# Altium PCB 发送端PCB.PCBDOC
Units mil, origin at the board's own origin, x right, y up, seen from the top; angles counter-clockwise.
Board outline 1459.66 x 397.67 mil, 4 copper layers (Top Layer, Mid-Layer 1, Mid-Layer 2, Bottom Layer); 48 components, 37 nets, 169 pads, 77 vias.
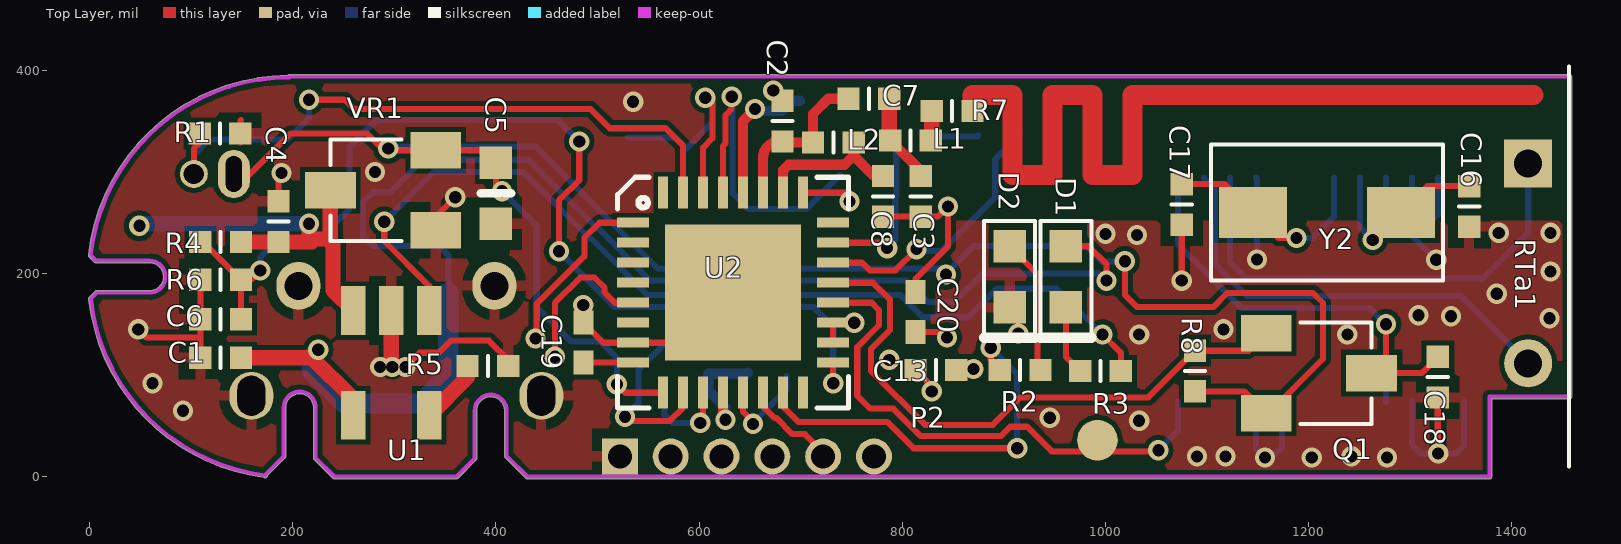
[diagram p0: Top Layer view]
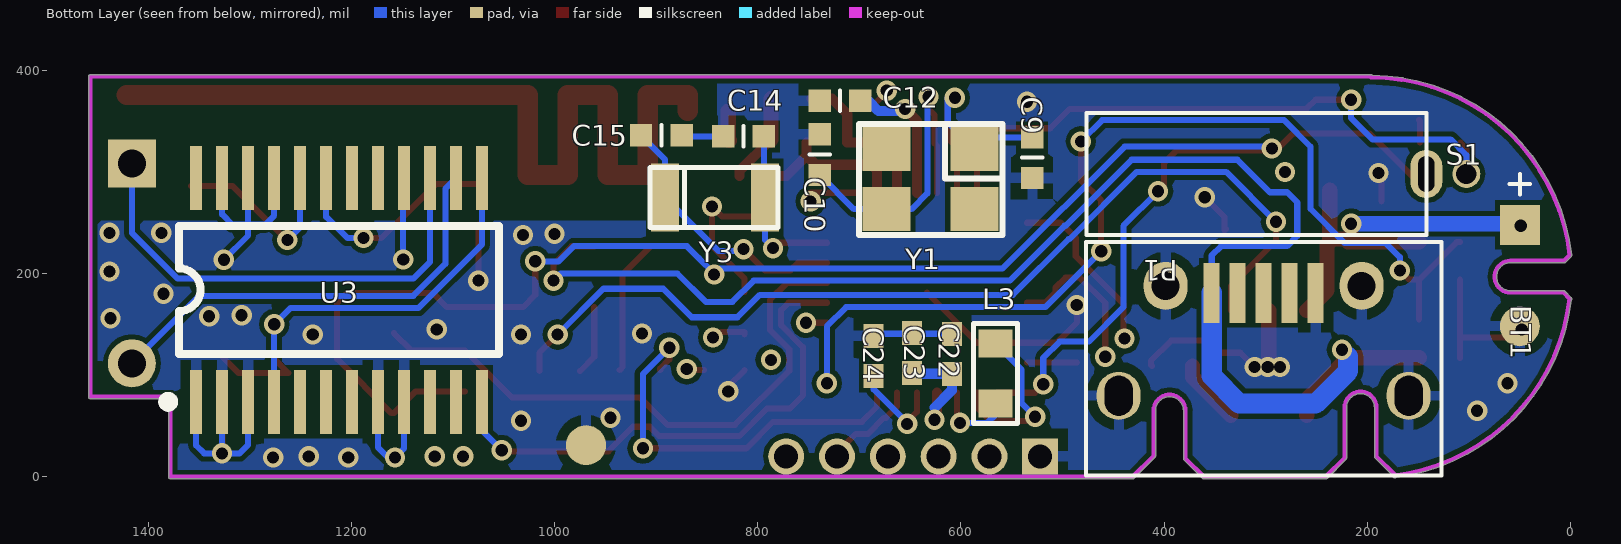
[diagram p1: Bottom Layer view, seen from below]
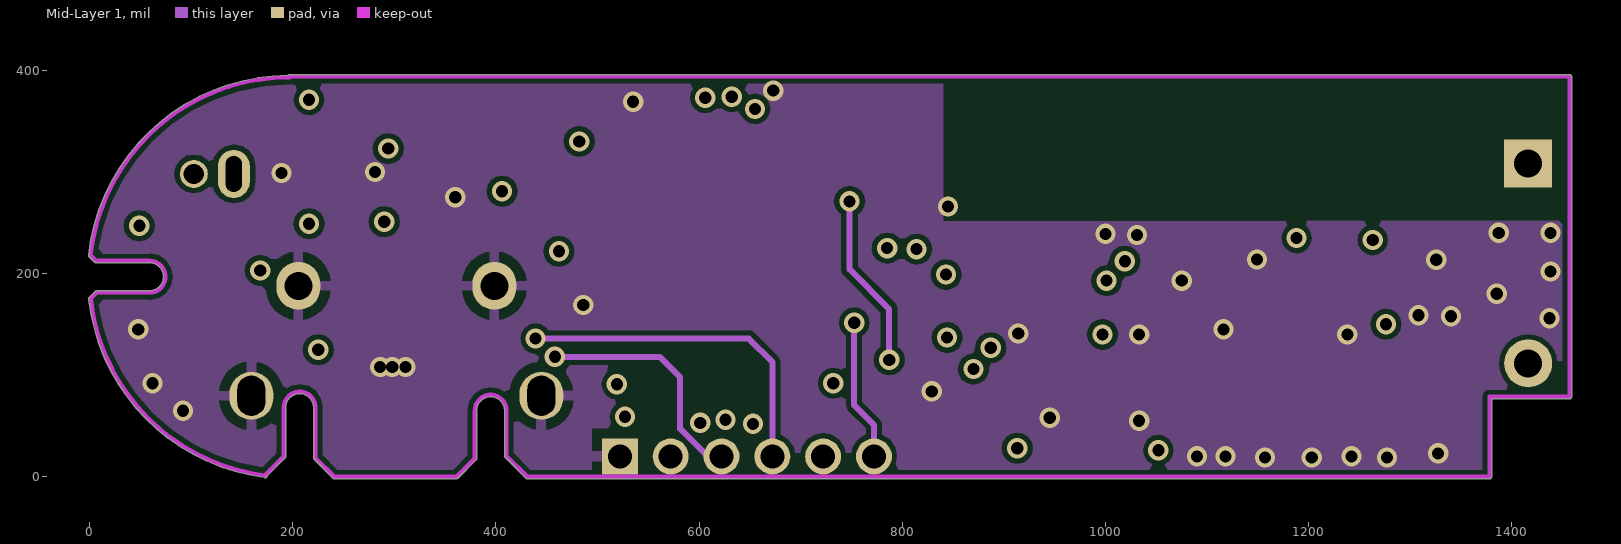
[diagram p2: Mid-Layer 1]
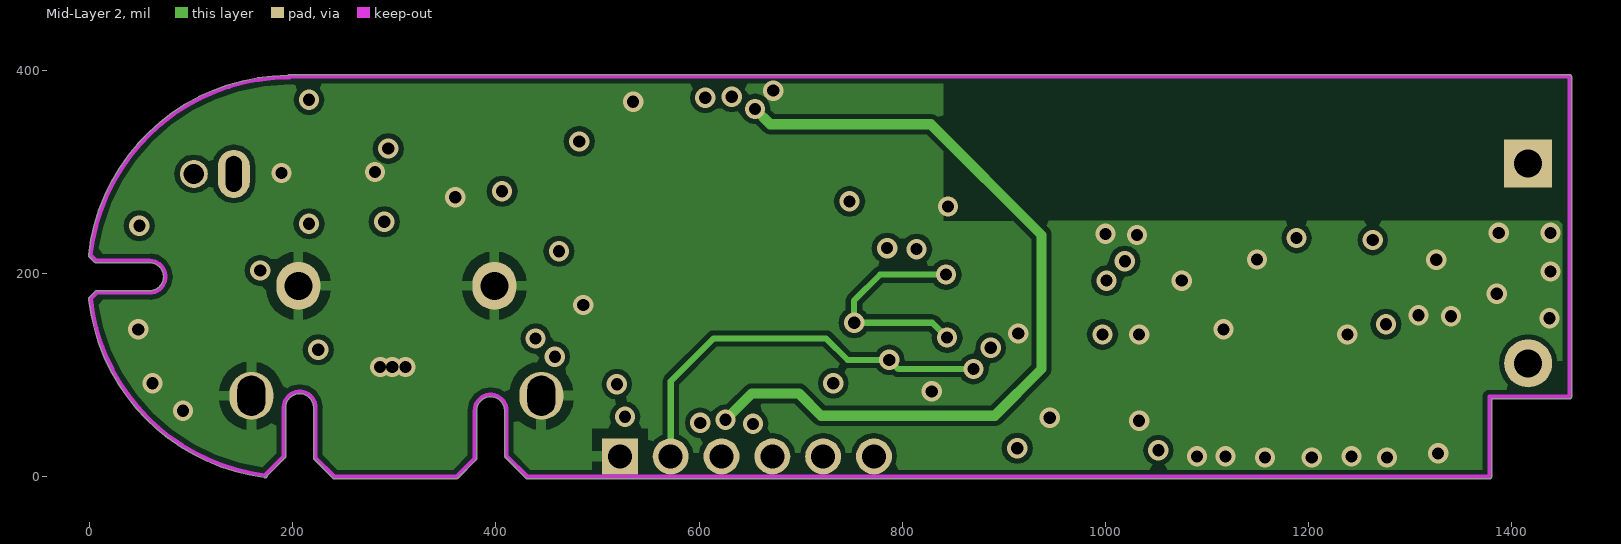
[diagram p3: Mid-Layer 2]

## Layer stack, top to bottom
Top Solder: solder mask 0.4, Solder Resist, Dk 3.5
Top Layer: signal copper 1.4
Dielectric1: core 12.6, FR-4, Dk 4.8
Mid-Layer 1: signal copper 1.4
Dielectric2: prepreg 12.6, FR-4, Dk 4.8
Mid-Layer 2: signal copper 1.4
Dielectric3: core 12.6, FR-4, Dk 4.8
Bottom Layer: signal copper 1.4
Bottom Solder: solder mask 0.4, Solder Resist, Dk 3.5

## Board outline
171.57,-0.37 ccw(c173,1) 174.98,0.98 ccw(c173.05,1.44) 175.02,1.22 192.4,18.6 192.39,18.59 ccw(c191,20) 192.98,20 192.98,68 cw(c206.75,68) 220.51,68 220.51,18.5 ccw(c222.5,18.5) 221.1,17.09 221.09,17.1 239.6,-1.4 239.59,-1.39 ccw(c241,0) 241,-1.98 361,-1.98 ccw(c361,0) 362.41,-1.39 362.4,-1.4 380.4,16.6 380.39,16.59 ccw(c379,18) 380.98,18 380.98,65 cw(c394.75,65) 408.51,65 408.51,20.5 ccw(c410.5,20.5) 409.1,19.09 409.09,19.1 429.6,-1.4 429.59,-1.39 ccw(c431,0) 431,-1.98 1377.95,-1.98 ccw(c1377.95,0) 1379.94,0 1379.94,76.76 1456.69,76.76 ccw(c1456.69,78.74) 1458.68,78.74 ccw(c1456.69,78.74) 1458.68,78.76 1458.68,393.7 ccw(c1456.69,393.7) 1456.69,395.68 196.64,395.68 ccw(c196.64,393.7) 195.14,395 ccw(c196.64,196.17) -0.97,218.22 ccw(c1,218) -0.39,216.59 -0.4,216.6 5,211.2 4.99,211.21 ccw(c6.4,212.6) 6.4,210.61 59.06,210.61 cw(c59.06,196.85) 72.82,196.85 cw(c59.06,196.85) 59.06,183.09 7.1,183.09 ccw(c7.1,181.1) 5.69,182.49 5.7,182.5 -0.4,176.4 ccw(c1,175) -0.66,173.91 ccw(c196.85,196.85)

## Design rules (kind name [scope] priority, off if disabled: settings)
Clearance [All] p1: gap=5
ComponentClearance [All] p1: gap=6 collisioncheckmode=3 verticalgap=10 showdistances=FALSE
FabricationTestpoint [(IsPad And (OnTopLayer Or OnBottomLayer))] p1: side=3 testpointundercomponent=TRUE minsize=40 maxsize=100 preferedsize=60 minholesize=0 maxholesize=40 preferedholesize=32 testpointgrid=1 allowsidetop=TRUE allowsidebottom=TRUE usegrid=TRUE gridtolerance=0.01
PolygonConnect PolygonConnect_1 [IsVia] p1: connectstyle=Direct reliefconductorwidth=10 reliefentries=4 polygonreliefangle="90 Angle" airgapwidth=10
PolygonConnect [All] p2: connectstyle=Relief reliefconductorwidth=10 reliefentries=4 polygonreliefangle="90 Angle" airgapwidth=10
RoutingCorners [All] p1: cornerstyle=Round minsetback=50 maxsetback=50
RoutingVias [All] p1: holewidth=12 width=20 viastyle="Through Hole" minholewidth=12 minwidth=20 maxholewidth=12 maxwidth=20
SolderMaskExpansion [All] p1: expansion=4
Width [All] p1: maxlimit=20 minlimit=6 preferedwidth=6
27 further rules are at their usual default settings.

## Components (designator, comment, footprint, x,y, rotation, side; value= is the part's Value field where it differs from the comment)
BT1 "Battery" BT 50,248 r270 bottom
C1 "1uF" 0402#1 109,117 r0 top
C2 "1.2pF/10V" 0402#1 682,330 r90 top
C3 "1.8pF/10V" 0402#1 818,256 r90 top
C4 "1uF" 0402#1 186,231 r90 top
C5 "22uF" 0603 400,309 r270 top
C6 "100nF" 0402#1 109,155 r0 top
C7 "220pF/10V" 0402#1 787,372 r180 top
C8 "18pF/10V" 0402#1 781,256 r90 top
C9 "12pF" 0402#1 530,334 r270 bottom
C10 "12pF" 0402#1 739,297 r90 bottom
C12 "2.2uF/10V" 0402#1 739,370 r180 bottom
C13 "1uF/10V" 0402#1 813,105 r0 top
C14 "6pF" 0402#1 834,335 r180 bottom
C15 "6pF" 0402#1 875,336 r0 bottom
C16 "15pF" 0402#1 1358,286 r270 top
C17 "15pF" 0402#1 1075,288 r270 top
C18 "100nF" 0402#1 1327,78 r90 top
C19 "1uF/10V" 0402#2 486,132 r270 top
C20 "0.1uF/10V" 0402#2 813,162 r270 top
C22 "1uF/10V" 0402#2 609,121 r270 bottom
C23 "0.1uF/10V" 0402#2 648,122 r270 bottom
C24 "1uF/10V" 0402#2 686,119 r270 bottom
D1 "LEDR" LED0603 961,196.85 r270 top
D2 "LEDG" LED0603 905.51,196.85 r270 top
L1 "1.8nH" 0402#1 828,331 r180 top
L2 "1.3nH" 0402#1 752,329 r180 top
L3 "47uH" 0603R 566,131 r270 bottom
P1 "microUSB" MICROUSB 302,181 r0 bottom
P2 "Header 6" SIP6-1.27 522,20 r0 top
Q1 "AO3401A" AO3401 1210,102 r270 top
R1 "10K" 0402#1 148.39,337.82 r180 top
R2 "1K" 0402#1 896,105 r0 top
R3 "1K" 0402#1 1015,104 r180 top
R4 "2M" 0402#1 109,231 r0 top
R5 "2K" 0402#1 412,109 r180 top
R6 "200K" 0402#1 109,194 r0 top
R7 "0" 0402#1 869,360 r180 top
R8 "10K" 0402#1 1088,124 r270 top
RTa1 "TX-40K" US-10mm 1416,210 r0 top
S1 "弹簧振动开关" SW 142,298 r0 bottom
U1 "TP4054" TP4054 297,112 r180 top
U2 "TLSR8258F512ET32" QFN-32 535,250 r0 top
U3 "CS102" TSSOP24 1212,184 r0 bottom
VR1 "MCP33" MCP33 237,282 r90 top
Y1 "24M" XTAL4TN_3225 630,293 r0 bottom
Y2 "8M" 5032 1218,260 r180 top
Y3 "32.768K" XTAL3215 793,275 r0 bottom

## Footprints (in the part's own frame and the unit in brackets; to place one, negate y for a bottom-side part, rotate by r counter-clockwise, add the part's x,y. Pads: shape width x height; smd on the part's side, far side on the other; paste and mask are expansions set on the pad)
0402#1 [mil]
  rect 22x22 smd: 1(0,0) 2(40,0)
  silkscreen extent 20,-10 20,10
0402#2 [mil] "Chip Capacitor, Body 1.0x0.5mm, IPC High Density"
  rect 23.62x19.68 smd: 1(-19.68,0) 2(19.69,0)
  body extent -22,-12 22,12, height 51
0603 [mil]
  rect 32x32 smd: 1(0,0) 2(60,0)
  silkscreen extent 30,-15 30,15
0603R [mm]
  rect 0.7x0.85 smd: 1(0,0) 2(1.5,0)
  silkscreen extent -0.5,-0.55 2,0.55
5032 [mm]
  rect 1.7x1.27 smd: 1(-1.85,0) 2(1.85,0)
  silkscreen extent -2.9,-1.7 2.9,1.7
AO3401 [mm]
  rect 0.915x1.27 smd: 1(-1,-1.318) 2(1,-1.318) 3(0,1.318)
  silkscreen extent -1.27,-0.46 1.27,1.32
BT [mm]
  rect 1x1 smd: 1(0,0)
  round 1 smd: 2(2.54,0)
  silkscreen extent -1.27,-0.25 -0.76,0.25
LED0603 [mil]
  rect 32x32 smd: 1(-30,0) 2(30,0)
  silkscreen extent -55,-25 60,25
MCP33 [mm]
  rect 0.915x1.27 smd: 1(0,0) 2(-1,-2.635) 3(1,-2.635)
  silkscreen extent -1.27,-1.78 1.27,0
MICROUSB [mm]
  rect 0.4x1.5 smd: 1(-1.3,0) 2(-0.65,0) 3(0,0) 4(0.65,0) 5(1.3,0)
  oval 1.1x1.2 hole 0.7 slot 1 at 90 deg: ""(-3.625,2.575) ""(3.625,2.575)
  oval 1.1x1.2 hole 0.7: ""(-2.45,-0.175) ""(2.45,-0.175)
  silkscreen extent -4.44,-1.27 4.44,4.57
QFN-32 [mm]
  rect 0.8x0.25 smd: 1(0,0) 2(0,-0.5) 3(0,-1) 4(0,-1.5) 5(0,-2) 6(0,-2.5) 7(0,-3) 8(0,-3.5) 17(5,-3.5) 18(5,-3) 19(5,-2.5) 20(5,-2) 21(5,-1.5) 22(5,-1) 23(5,-0.5) 24(5,0)
  rect 0.25x0.8 smd: 9(0.75,-4.25) 10(1.25,-4.25) 11(1.75,-4.25) 12(2.25,-4.25) 13(2.75,-4.25) 14(3.25,-4.25) 15(3.75,-4.25) 16(4.25,-4.25) 25(4.25,0.75) 26(3.75,0.75) 27(3.25,0.75) 28(2.75,0.75) 29(2.25,0.75) 30(1.75,0.75) 31(1.25,0.75) 32(0.75,0.75)
  rect 3.4x3.4 smd: 33(2.5,-1.75)
  silkscreen extent -0.39,-4.64 5.39,1.14
SIP6-1.27 [mm]
  rect 0.9x0.9 hole 0.6: 1(0,0)
  round 0.9 hole 0.6: 2(1.27,0) 3(2.54,0) 4(3.81,0) 5(5.08,0) 6(6.35,0)
SW [mm]
  oval 0.8x1.2 hole 0.4 slot 0.9 at 90 deg: 1(0,0)
  round 0.7 hole 0.508: 2(-1,0)
  silkscreen extent 0,-1.52 8.5,1.52
TP4054 [mm]
  rect 0.62x1.22 smd: 1(-0.95,-1.31) 2(0,-1.31) 3(0.95,-1.31) 4(0.95,1.31) 5(-0.95,1.31)
TSSOP24 [mm] "Shrink Small Outline; 24 Leads; Body Width 4.4 mm; Pitch 0.65 mm"
  rect 0.3x1.6 smd: 1(3.575,2.8) 2(2.925,2.8) 3(2.275,2.8) 4(1.625,2.8) 5(0.975,2.8) 6(0.325,2.8) 7(-0.325,2.8) 8(-0.975,2.8) 9(-1.625,2.8) 10(-2.275,2.8) 11(-2.925,2.8) 12(-3.575,2.8) 13(-3.575,-2.8) 14(-2.925,-2.8) 15(-2.275,-2.8) 16(-1.625,-2.8) 17(-0.975,-2.8) 18(-0.325,-2.8) 19(0.325,-2.8) 20(0.975,-2.8) 21(1.625,-2.8) 22(2.275,-2.8) 23(2.925,-2.8) 24(3.575,-2.8)
  silkscreen extent -4,-1.6 4.4,2.92
US-10mm [mm]
  round 1.2 hole 0.7: +(0,-2.5)
  rect 1.2x1.2 hole 0.7: -(0,2.5)
  silkscreen extent 1.02,-5.08 1.02,4.92
XTAL4TN_3225 [mm]
  rect 1.2x1.1 smd: 1(-1.1,-0.75) 2(1.1,0.75) 3(1.1,-0.75) 4(-1.1,0.75)
  silkscreen extent -1.8,-1.38 1.79,1.4
XTAL3215 [mm]
  rect 0.7x1.7 smd: 1(2.5,0) 2(0,0)
  silkscreen extent -0.33,-0.75 2.87,0.75

## Part data
BT1: "Multicell Battery"
C1 C2 C3 C4 C5 C6 C7 C8 C9 C10 C12 C13 C14 C15 C16 C17 C18 C19 C20 C22 C23 C24: library part Cap, "Capacitor"
D1 D2: library part LED0, "Typical INFRARED GaAs LED"
L1 L2 L3: library part Inductor, "Inductor"
P1: library part "Header 5", "Header, 5-Pin"
P2: "Header, 6-Pin"
Q1: library part "AO3401A P道沟 X13A15 SOT-23", "MOS(场效应管)"
R1 R2 R3 R4 R5 R6 R7 R8: library part Res1, "Resistor"
RTa1: library part TC40K
S1: library part SW-SPST, "Single-Pole, Single-Throw Switch"
U3: library part CS100
VR1: library part "Volt Reg", "Voltage Regulator"
Y1 Y2 Y3: library part XTAL, "Crystal Oscillator"

## Free pads (board coordinates)
  round 40 smd: 0(992,36)
  round 39.37 smd far side: 1(969,31)

## Via types
v1: diameter 20, hole 12, Top Layer to Bottom Layer, tented both sides, 77 vias

## Nets (pads, with @x,y where several pads share a name; then routed paths per layer and width w, separated by ;. In a path a pad name is that pad's centre, name@x,y a point inside that pad or via, vN(x,y) a via of type N, cw(c..) or ccw(c..) an arc to the next point about the centre after c; other vN are vias at no path point)
1.2V: C12.2 C22.2 C23.2 U2.12 U2.28 | length 1055.5
  Top Layer w10: v1@623.58,58.58 U2.12 ; U2.28 643.27,350.27 v1(655,362)
  Mid-Layer 2 w10: v1(626,56) 652,82 698,82 720,60 891,60 937,106 937,238 828,347 670,347 v1(655,362)
  Bottom Layer w10: 626,68 609,85 C22.2 647,101.31 C23.2 ; v1(655,362) 657,360 681.28,360 691.28,370 C12.2
+3.3V: C5.1 C20.2 P2.6 Q1.2 R8.2 S1.1 U2.9 U2.18 U2.19 VR1.3 | length 2312.9
  Top Layer w6: S1.1@142,282 198,338 273,338 288,323 v1(294,323) ; v1@294,321.37 VR1.3 387.63,321.37 C5.1 400,287 v1(406,281) ; v1(519,91) 527.32,82.68 U2.9 ; U2.18 U2.19 v1(752.57,151.57) ; C20.2@813,140.13 C20.2 838.69,142.31 v1(844,137) ; v1(1019,212) 1019,179 1031,167 1106,167 1120,181 1204,181 1214,171 1214,116 1160.63,62.63 Q1.2 1136.76,84 R8.2
  Mid-Layer 1 w6: v1(752.57,151.57) 752.57,70.43 772,51 P2.6
  Mid-Layer 2 w6: v1(843,199) 778,199 752.57,173.57 v1(752.57,151.57) 829.43,151.57 v1(844,137)
  Bottom Layer w6: v1(294,323) 296,325 439,325 559,205 837,205 v1(843,199) 843,200.04 858.11,215.15 869.96,227 981,227 996,212 v1(1019,212) ; v1(406,281) 440.1,246.9 440.1,166.9 474,133 503,133 519,117 v1(519,91)
+5V: C1.2 D1.1 P1.5 U1.4 | length 1453.4
  Top Layer w6: D1.1 983.15,226.85 1001,209 v1(1001,193)
  Top Layer w15: C1.2 217,117 ; v1@218,118 259.6,76.4 U1.4
  Bottom Layer w6: P1.5 353.18,217.82 344,227 279,227 269,237 269,270 279,280 296,280 328,312 432,312 497,247 ; 498,247 552,193 804,193 825,172 851,172 879,200 994,200 v1(1001,193)
  Bottom Layer w15: v1@218,118 v1(225,125)
  Bottom Layer w20: v1@219,118 219,104 251,72 326,72 353.18,99.18 P1.5
ADC0: C6.2 R4.1 R6.2 U2.17 | length 1037.7
  Top Layer w6: R4.1 112,231 R6.2 ; C6.2 R6.2 ; v1(168,203) 159,194 R6.2 ; v1(462,222) 462,272 482,292 v1(482,330) ; v1@731.85,92.15 U2.17
  Bottom Layer w6: v1(168,203) 168,216 182,230 222.46,230 256,263.54 256,325 282,351 461,351 v1(482,330) ; v1(462,222) 517,167 713,167 732,148 v1(732,92)
CS102-EN: Q1.1 R8.1 U2.21 | length 589.6
  Top Layer w6: U2.21 771.05,190.95 788,174 788,144.46 769,125.46 769,104 769.56,104 822.56,51 889,51 916,78 1042,78 R8.1 1140.76,124 Q1.1
CS102-T: pad.0 U2.20 U3.12 | length 524
  Top Layer w6: U2.20 769.74,171.26 777,164 777,149.01 755.6,127.61 755.6,79.85 768.44,67 791,67 818,40 897,40 906.16,49.16 922.84,49.16 947,25 1051,25 v1(1052,26)
  Bottom Layer w6: v1(1052,26) 1071.25,45.25 U3.12
GND: BT1.2 C1.1 C2.2 C3.1 C4.2 C5.2 C6.1 C8.1 C9.2 C10.2 C12.1 C13.1 C14.1 C15.1 C16.2 C17.2 C18.1 C19.1 C20.1 C22.1 C23.1 C24.1 D2.2 P1. P1.1 P2.1 pad.1 R1.1 R5.1 R6.1 U1.2 U2.7 U2.33 U3.1 U3.2 U3.3 U3.8 U3.9 U3.16 U3.21 U3.22 U3.23 VR1.2 | length 1675.3
  Top Layer w6: v1(48,145) 56,137 109,137 ; C1.1 109,137 ; R6.1 C6.1 109,137 ; R1.1@148.39,328.82 148.39,350.39 149,351 ; C4.2 186,296 v1(189,299) ; v1(311,108) 325,122 343.61,122 355.61,134 393,134 413,114 413,110 R5.1 ; VR1.2@339.37,244 VR1.2 340.74,255.74 v1(360,275) ; v1(486,169) C19.1 505.8,131.89 U2.7 584.21,131.89 U2.33 ; v1@668.27,383.73 C2.2 ; C8.1 C3.1 835,256 v1(845,266) 845,227 813,195 C20.1 ; C13.1 829,89 v1(829,84) ; v1(1075,193) C17.2 ; C18.1 1327,23.31 v1(1327.31,23)
  Top Layer w15: U1.2 297,109 v1(298,108)
  Bottom Layer w6: C22.1 684,140.68 C24.1 ; C14.1 874,335 C15.1 ; U3.9 1148.02,27.98 v1(1157,19) 1164,19 1173.61,28.61 U3.8 ; U3.16 1149,293.26 v1(1149,213.82) ; U3.21 1275.98,257.02 1285,248 1317,248 1327.16,258.16 U3.23 ; U3.3 1301.57,31.43 1310,23 v1(1327.31,23) ; U3.22 1301.57,237.43 v1(1325.49,213.51) ; U3.2 1327.16,23.16 v1(1327.31,23) ; U3.1 1352.75,30.75 1345,23 v1(1327.31,23)
  other v1: 1203,19 1277,19 1090,20 1118,20 1242,20 1033,55 945,58 92,65 62,92 286,108 1033,140 1238,140 914,141 1116,145 1437,156 1340,158 1308,159 1385,180 1438,202 1031,238 1000,239 1387,240 1438,240 281,300 535,369 673,380
LED: R2.1 U2.15 | length 396.5
  Top Layer w6: U2.15 682.64,68.97 697.6,54 785,54 811,28 v1(913,28) ; v1(887,127) 887,115.46 896,106.46 R2.1
  Bottom Layer w6: v1(887,127) 913,101 v1(913,28)
NetC2_1: C2.1 C7.2 L2.2 U2.27 | length 162.3
  Top Layer w10: U2.27 662.95,313.95 cw(c679,313.95) 679,330 680,329 L2.2 712,357 727,372 C7.2
NetC3_2: C3.2 C7.1 L1.2 | length 88.8
  Top Layer w10: L1.2 818,301 C3.2
  Top Layer w15: C7.1 787,332 L1.2
NetC8_2: C8.2 L2.1 U2.26 | length 147.7
  Top Layer w10: U2.26 682.64,301.64 688,307 743,307 752,316 ; L2.1 752,316 ; C8.2 772,296 752,316
NetC9_1: C9.1 U2.30 Y1.1 | length 217.8
  Top Layer w6: U2.30 603.9,323.9 613,333 613,373 v1(606,373)
  Bottom Layer w6: C9.1 Y1.1@575.22,334 ; Y1.1 613,348.83 613,373 v1(606,373)
NetC10_1: C10.1 U2.29 Y1.2 | length 308.3
  Top Layer w6: U2.29 623.58,325.58 626,328 626,356 632,362 v1(632,374)
  Bottom Layer w6: 633,363 633,279 648.53,263.47 Y1.2 705.47,263.47 C10.1
NetC14_2: C14.2 U2.23 Y3.2 | length 156.4
  Top Layer w6: U2.23 779.68,230.32 v1(785,225)
  Bottom Layer w6: 793,233 Y3.2 ; Y3.2@794,276 C14.2
NetC15_2: C15.2 U2.22 Y3.1 | length 266.2
  Top Layer w6: U2.22 760.37,210.63 768,203 793,203 v1(814,224)
  Bottom Layer w6: v1(814,224) 814,222 838.43,222 Y3.1 891.43,312.43 C15.2
NetC16_1: C16.1 U3.20 Y2.1 | length 183.4
  Top Layer w6: v1(1263,233) 1263.83,233 Y2.1 1316.83,286 C16.1
  Bottom Layer w6: U3.20 1250.39,245.61 v1(1263,233)
NetC17_1: C17.1 U3.19 Y2.2 | length 218.8
  Top Layer w6: C17.1 1117.17,288 Y2.2 1170.17,235 v1(1188,235)
  Bottom Layer w6: v1(1188,235) 1204,235 1224.8,255.8 U3.19
NetC19_2: C19.2 U2.8 | length 48.9
  Top Layer w6: C19.2 U2.8@534.89,112.31
NetC24_2: C24.2 U2.13 | length 113.4
  Top Layer w6: U2.13 643.27,63.73 v1@651,56 ; v1@649.58,52.75 649.58,54.58 v1@651,56 ; v1@656,51 651,51 v1@651,56
  Bottom Layer w6: v1@649.58,52.75 649.58,54.58 651,54.58 651,51 686,86 C24.2
  other v1: 653,52
NetD1_2: D1.2 R3.2 | length 68.6
  Top Layer w6: D1.2 961,118 R3.2
NetD2_1: D2.1 R2.2 | length 134.5
  Top Layer w6: D2.1 933,199.36 933,108 R2.2
NetL1_1: L1.1 R7.2 | length 29.4
  Top Layer w15: L1.1 829,332 R7.2
NetL3_1: L3.1 U2.10 | length 167
  Top Layer w6: v1(527,59) 531,55 571.13,55 584.21,68.08 U2.10
  Bottom Layer w6: v1(527,59) 540.27,72.27 540.27,105.27 L3.1
NetL3_2: L3.2 U2.11 | length 85.9
  Top Layer w6: v1@598.58,55.16 v1@598.58,55.58 ; U2.11 603.9,60.9 v1@598.58,55.58 ; v1@598.58,55.58 598,55 598,56.42 598.58,56.42 v1@598.58,55.58
  Bottom Layer w6: L3.2 566,61 574,53 v1(601,53) ; v1@598,55 598,56.42 598.58,56.42 v1@598.58,55.16
NetR3_1: R3.1 U1.1 | length 966
  Top Layer w6: v1(290,251) 290,232 334.4,187.6 U1.1 ; v1(997,140) 1015,122 R3.1
  Bottom Layer w6: v1(290,251) 339,300 427.03,300 493.03,234 494.03,234 549.03,179 798,179 820,157 865,157 893,185 952,185 v1(997,140)
NetR5_2: R5.2 U1.5 | length 64.1
  Top Layer w15: U1.5 372,98.02 R5.2
RESET: C13.2 P2.2 U2.25 | length 636.7
  Top Layer w6: U2.25 v1@748,279.53 ; C13.2 v1@870,105
  Mid-Layer 1 w6: v1(748,271) 748,204 787,165 v1(787,115)
  Mid-Layer 2 w6: P2.2 572,94 614,136 725,136 746,115 v1(787,115) 796,106 v1(870,106)
RX: U2.3
S_TN: RTa1.- U3.15 | length 470.2
  Bottom Layer w6: U3.15 1122.43,211.57 1139,195 1371,195 1416,240 RTa1.-
S_TP: RTa1.+ U3.14 | length 438.2
  Bottom Layer w6: U3.14 1107.53,283.55 1107.53,209.5 1139.03,178 1349.57,178 RTa1.+
SWM: P2.4 U2.1 | length 510.6
  Top Layer w6: v1(439,136) 440,135 440,154.39 440.1,154.5 440.1,170.1 487,217 487,235 502,250 U2.1
  Mid-Layer 1 w6: v1(439,136) 649,136 672,113 P2.4
SWS: P2.3 U2.5 | length 387.6
  Top Layer w6: v1(458,118) 458,171.03 482.97,196 497,196 507,186 507,181.26 517,171.26 U2.5
  Mid-Layer 1 w6: v1(458,118) 561,118 581.18,97.82 581.18,47.18 608.37,20 P2.3
TP: P2.5 U2.14 | length 91.4
  Top Layer w6: U2.14 662.95,68.96 673.99,57.93 675.85,57.93 691.78,42 704,42 P2.5@722,24
TX: U2.6
VBAT: BT1.1 C4.1 R4.2 U1.3 VR1.1 | length 404.3
  Top Layer w15: R4.2 C4.1 219,231 216,234 ; v1(216,249) 216,234 ; 237,231 239.7,228.3 239.7,183.48 U1.3 ; VR1.1 237,232 235,234 216,234
  Bottom Layer w15: BT1.1 51,249 v1(216,249)
  other v1: 49,247
VCC-CS102: C18.2 Q1.3 U3.4 U3.13 | length 504.7
  Top Layer w6: v1(1275.98,150.02) 1275.98,116.11 Q1.3 1311,102 C18.2
  Bottom Layer w6: U3.13 1071.25,228.81 1134.06,166 1260,166 v1(1275.98,150.02) U3.4
WKUP: R1.2 S1.2 U2.31 | length 652.4
  Top Layer w6: S1.2 102.63,323.06 R1.2@108.39,328.82 ; v1(216,371) 251,371 260,362 432,362 ; 452.97,362 432,362 ; U2.31 584.21,325.79 567,343 512,343 493,362 432,362
  Bottom Layer w6: S1.2 102.63,316.63 118,332 195,332 216,353 v1(216,371)
pads on no net: P1.2 P1.3 P1.4 R7.1 U2.2 U2.4 U2.16 U2.24 U2.32 U3.5 U3.6 U3.7 U3.10 U3.11 U3.17 U3.18 U3.24 Y1.3 Y1.4
copper on no net: | length 882.6
  Top Layer w20: 869,360 869,375.73 908.39,375.73 908.39,297.01 947.77,297.01 947.77,375.73 987.16,375.73 987.16,297.01 1026.54,297.01 1026.54,375.73 1421,375.73

## Polygon pours and split planes (outlines as drawn)
GND on Top Layer "Top Layer-No Net" (solid, remove dead copper, pour order 1000): 21,452 54,485 1504,485 1504,-8 1513,-17 1432,-98 727,-98 141,-98 30,13 -21,64 -21,216 -21,418 27,466
GND on Mid-Layer 1 "Top Layer-No Net" (solid, remove dead copper, pour order 1001): 21,452 54,485 1504,485 1504,-8 1513,-17 1432,-98 727,-98 141,-98 30,13 -21,64 -21,216 -21,418 27,466
GND on Mid-Layer 2 "Top Layer-No Net" (solid, remove dead copper, pour order 1002): 21,452 54,485 1504,485 1504,-8 1513,-17 1432,-98 727,-98 141,-98 30,13 -21,64 -21,216 -21,418 27,466
GND on Bottom Layer "Top Layer-No Net" (solid, remove dead copper, pour order 1003): 21,452 54,485 1504,485 1504,-8 1513,-17 1432,-98 727,-98 141,-98 30,13 -21,64 -21,216 -21,418 27,466

## Keep-outs
Keep-Out Layer:
  lines w3.94: 1,175 7.1,181.1 59.06,181.1 ccw(c59.06,196.85) 59.06,212.6 6.4,212.6 1,218 cw(c196.64,196.17) 196.64,393.02 ; 1.21,175.02 ccw(c196.85,196.85) 173.05,1.44 ; 173,1 173,2 191,20 191,68 cw(c206.75,68) 222.5,68 222.5,18.5 241,0 361,0 379,18 379,65 cw(c394.75,65) 410.5,65 410.5,20.5 ; 196.64,393.7 1456.69,393.7 1456.69,78.74 1377.95,78.74 1377.95,0 431.89,0 431,0 411,20 ; 410.5,20.5 411,20 ; 410.5,20.5 411,20

## Other copper
Multi-Layer:
  pour cut-out: 825,395 840,393.7 840,320 840,251.69 1453,252 1455,250 1456.69,251.69 1456.69,393.7 824,393.7